# EAGLE board Proiect TSC (EAGLE 9.7.0)
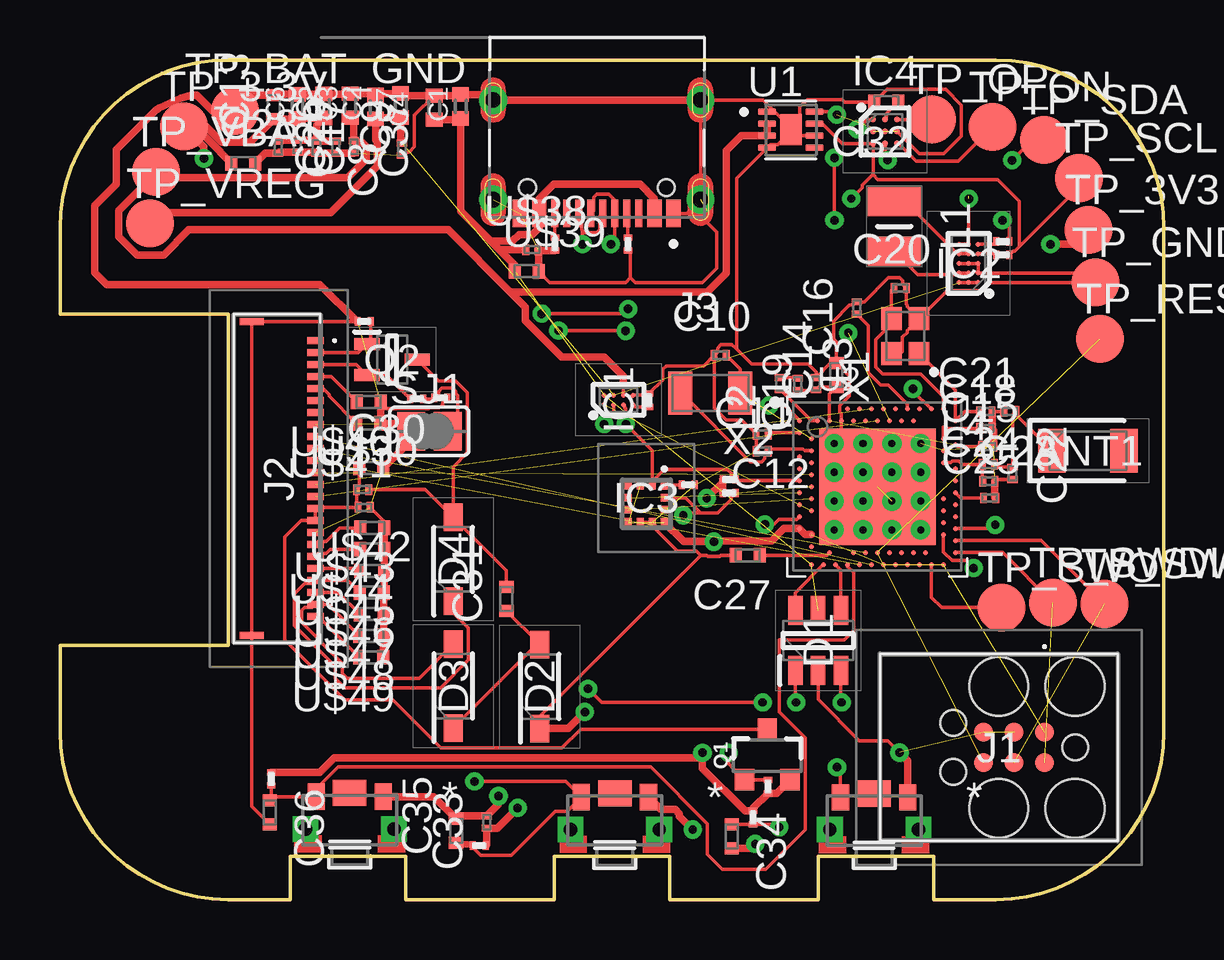
[diagram p0: board, top side]
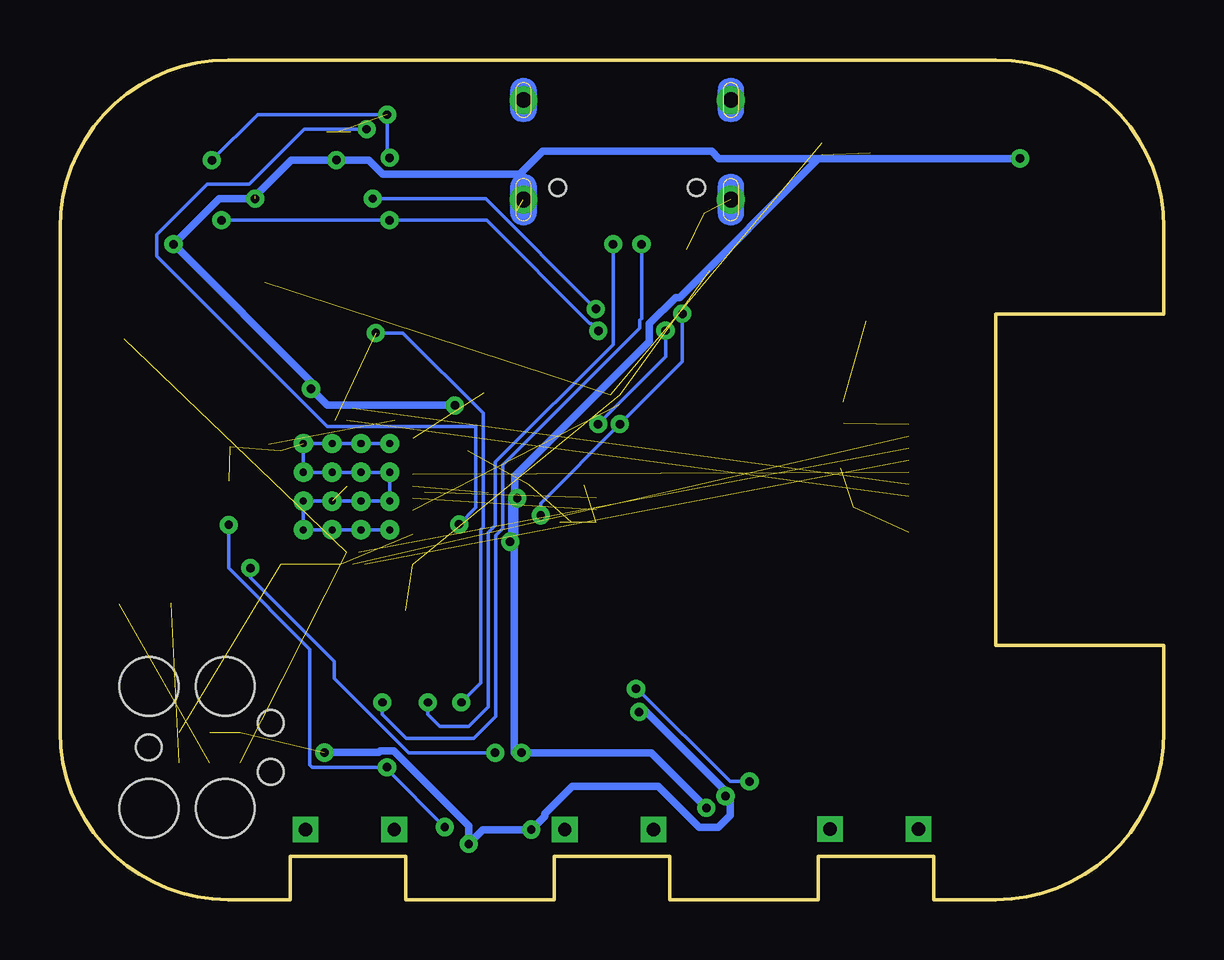
[diagram p1: board, bottom side, seen from below]

Size 46 x 35 mm. Coordinates in mm from the lower left corner, seen from the top.
Outline: 39,0 36.4,0 36.4,1.8 31.6,1.8 31.6,0 25.4,0 25.4,1.8 20.6,1.8 20.6,0 14.4,0 14.4,1.8 9.6,1.8 9.6,0 7,0 arc-90 0,7 0,10.6 7,10.6 7,24.4 0,24.4 0,28 arc-90 7,35 39,35 arc-90 46,28 46,7 arc-90 39,0
Copper layers (1*16): Top 0.035mm / dielectric 1.5mm / Bottom 0.035mm
Design rules "Fusion Electronics Design Rules": minimum track width 6mil, minimum drill 0.35mm, track to track 6mil, track to pad 6mil, pad to pad 6mil, via to via 6mil, smd to smd 6mil, copper to edge 40mil, drill to drill 6mil, minimum pad ring 10mil, minimum via ring 8mil, stop-mask expansion 4mil, vias tented up to drill 9999mil, thermal gap 10mil

## Footprints (pad centres in the part's own frame; a part is rotated, then mirrored left to right if it is on the bottom)
2450AT18B100E_ANTC3216X140N = smd 1.15 x 1.8: 1 -1.5,0; 2 1.5,0
PERFECT_0402_0402 = smd 0.6 x 0.7: 1 -0.5,0; 2 0.5,0
NORDIC_NRF_3_RESC0201_L = smd 0.28 x 0.43: 1 -0.255,0; 2 0.255,0
NORDIC_NRF_3_RESC0402_L = smd 0.5 x 0.6: 1 -0.5,0; 2 0.5,0
ESP32_C6_LIBRARY_3_SOT95P280X145-6N = smd 1.2 x 0.6: 1 -1.25,0.95; 2 -1.25,0; 3 -1.25,-0.95; 4 1.25,-0.95; 5 1.25,0; 6 1.25,0.95
ESP32_C6_LIBRARY_5_SOD3716X135N = smd 1.15 x 0.8: 1 -1.75,0; 2 1.75,0
BQ25180YBGR_BGA8C40P2X4_100X155X50 = smd 0.2 x 0.2: A1 -0.2,0.6; A2 0.2,0.6; B1 -0.2,0.2; B2 0.2,0.2; C1 -0.2,-0.2; C2 0.2,-0.2; D1 -0.2,-0.6; D2 0.2,-0.6
RT6160AWSC_BGA15C40P3X5_140X230X60 = smd 0.216 x 0.216: A1 -0.4,0.8; A2 0,0.8; A3 0.4,0.8; B1 -0.4,0.4; B2 0,0.4; B3 0.4,0.4; C1 -0.4,0; C2 0,0; C3 0.4,0; D1 -0.4,-0.4; D2 0,-0.4; D3 0.4,-0.4; E1 -0.4,-0.8; E2 0,-0.8; E3 0.4,-0.8
BMA423_BMA423 = smd 0.3 x 0.35: 1 -0.75,-0.775; 2 -0.25,-0.775; 3 0.25,-0.775; 4 0.75,-0.775; 7 0.75,0.775; 8 0.25,0.775; 9 -0.25,0.775; 10 -0.75,0.775 | smd 0.35 x 0.3: 5 0.775,-0.25; 6 0.775,0.25; 11 -0.775,0.25; 12 -0.775,-0.25
DRV2605YZFR_BGA9C50P3X3_144X144X62 = smd 0.25 x 0.25: A1 -0.5,0.5; A2 0,0.5; A3 0.5,0.5; B1 -0.5,0; B2 0,0; B3 0.5,0; C1 -0.5,-0.5; C2 0,-0.5; C3 0.5,-0.5
TC2030-IDC_TC2030IDC = smd 0.783 x 0.783: 1 -0.953,-0.635; 2 -0.953,0.635; 3 0.317,-0.635; 4 0.317,0.635; 5 1.588,-0.635; 6 1.588,0.635 | hole 2.451: -2.223,-2.54; -2.223,2.54; 0.952,-2.54; 0.952,2.54 | hole 1.067: -2.223,0; 2.857,-1.016; 2.857,1.016
503480-2400_5034802400 = smd 0.3 x 0.7: 1 -5.75,1.525; 2 -5.25,1.525; 3 -4.75,1.525; 4 -4.25,1.525; 5 -3.75,1.525; 6 -3.25,1.525; 7 -2.75,1.525; 8 -2.25,1.525; 9 -1.75,1.525; 10 -1.25,1.525; 11 -0.75,1.525; 12 -0.25,1.525; 13 0.25,1.525; 14 0.75,1.525; 15 1.25,1.525; 16 1.75,1.525; 17 2.25,1.525; 18 2.75,1.525; 19 3.25,1.525; 20 3.75,1.525; 21 4.25,1.525; 22 4.75,1.525; 23 5.25,1.525; 24 5.75,1.525 | smd 0.3 x 1: MP1 -6.54,-1.125; MP2 6.54,-1.125
KH-TYPE-C-16P_KINGHELM_KH-TYPE-C-16P = smd 0.6 x 1.15: A1_B12 -3.2,4.725; A4_B9 -2.4,4.725; A9_B4 2.4,4.725; A12_B1 3.2,4.725 | smd 0.3 x 1.15: A5 -1.25,4.725; A6 -0.25,4.725; A7 0.25,4.725; A8 1.25,4.725; B5 1.75,4.725; B6 0.75,4.725; B7 -0.75,4.725; B8 -1.75,4.725 | drill 0.65 pad 1.05: SH1 -4.32,0; SH2 4.32,0; SH3 -4.32,4.15; SH4 4.32,4.15 | hole 0.7: -2.89,3.65; 2.89,3.65
MLP2016SR47MT0S1_INDC2016X100N = smd 1.2 x 2.2: 1 -1.028,0; 2 1.028,0
NORDIC_NRF_2_RESC0201_L = smd 0.28 x 0.43: 1 -0.255,0; 2 0.255,0
ESP32_C6_LIBRARY_4_ESP32_C6_LIBRARY_4_ESP32_C6_LIBRARY_4_ESP32_C6_LIBRARY_4_ESP32_WROVER_SPARKFUN-DISCRETESEMI_SOT23-3 = smd 0.8 x 0.9: 1 -0.95,-1; 2 0.95,-1; 3 0,1.1
ESP32_C6_LIBRARY_6_SOT65P210X110-3N = smd 1.05 x 0.5: 1 -1.05,0.65; 2 -1.05,-0.65; 3 1.05,0
CPF0201D7K68C1_0201 = smd 0.35 x 0.25: 1 0,0.275; 2 0,-0.275
ESP32_C6_LIBRARY_7_JUMPER_SJ = smd 1.168 x 1.6: 1 -0.762,0; 2 0.762,0
2025-10-22_07-23-44_LIBRARY_SW_EVP-AKE31A_PAN = smd 0.711 x 1.092: 1 -1.4,-0.972; 2 1.4,-0.972 | drill 0.559 pad 0.914 square: 3 -1.848,0.381; 4 1.848,0.381 | smd 1.397 x 1.092: 5 0,-1.124
HECTOR_WATCH_1_TP20R = smd 2 x 2: TP 0,0
ESP32_C6_LIBRARY_SON50P200X200X80-9N = smd 0.76 x 0.27: 1 -0.985,0.75; 2 -0.985,0.25; 3 -0.985,-0.25; 4 -0.985,-0.75; 5 0.985,-0.75; 6 0.985,-0.25; 7 0.985,0.25; 8 0.985,0.75 | smd 0.9 x 1.3: 9 0,0
NORDIC_NRF_4_AQFN50P700X700X85_HS-74N = smd 4.85 x 4.85: P$74 0,0 | drill 0.3 pad 0.6: P$75 -1.8,1.8; P$76 -0.6,1.8; P$77 0.6,1.8; P$78 1.8,1.8; P$79 -1.8,0.6; P$80 -0.6,0.6; P$81 0.6,0.6; P$82 1.8,0.6; P$83 -1.8,-0.6; P$84 -0.6,-0.6; P$85 0.6,-0.6; P$86 1.8,-0.6; P$87 -1.8,-1.8; P$88 -0.6,-1.8; P$89 0.6,-1.8; P$90 1.8,-1.8 | smd 0.2 x 0.2: P$A8 -1.25,3.25; P$A10 -0.75,3.25; P$A12 -0.25,3.25; P$A14 0.25,3.25; P$A16 0.75,3.25; P$A18 1.25,3.25; P$A20 1.75,3.25; P$A22 2.25,3.25; P$A23 2.75,3.25; P$AA24 3.25,-2.25; P$AB2 -2.75,-2.5; P$AC5 -2,-2.75; P$AC9 -1,-2.75; P$AC11 -0.5,-2.75; P$AC13 0,-2.75; P$AC15 0.5,-2.75; P$AC17 1,-2.75; P$AC19 1.5,-2.75; P$AC21 2,-2.75; P$AC24 3.25,-2.75; P$AD2 -2.75,-3.25; P$AD4 -2.25,-3.25; P$AD6 -1.75,-3.25; P$AD8 -1.25,-3.25; P$AD10 -0.75,-3.25; P$AD12 -0.25,-3.25; P$AD14 0.25,-3.25; P$AD16 0.75,-3.25; P$AD18 1.25,-3.25; P$AD20 1.75,-3.25; P$AD22 2.25,-3.25; P$AD23 2.75,-3.25; P$B1 -3.25,2.75; P$B3 -2.5,2.75; P$B5 -2,2.75; P$B7 -1.5,2.75; P$B9 -1,2.75; P$B11 -0.5,2.75; P$B13 0,2.75; P$B15 0.5,2.75; P$B17 1,2.75; P$B19 1.5,2.75; P$B24 3.25,2.75; P$C1 -3.25,2.25; P$D2 -2.75,2; P$D23 2.75,2; P$E24 3.25,1.75; P$F2 -2.75,1.5; P$F23 2.75,1.5; P$G1 -3.25,1.25; P$H2 -2.75,1; P$H23 2.75,1; P$J1 -3.25,0.75; P$J24 3.25,0.75; P$K2 -2.75,0.5; P$L1 -3.25,0.25; P$L24 3.25,0.25; P$M2 -2.75,0; P$N1 -3.25,-0.25; P$N24 3.25,-0.25; P$P2 -2.75,-0.5; P$P23 2.75,-0.5; P$R1 -3.25,-0.75; P$R24 3.25,-0.75; P$T2 -2.75,-1; P$T23 2.75,-1; P$U1 -3.25,-1.25; P$U24 3.25,-1.25; P$V23 2.75,-1.5; P$W1 -3.25,-1.75; P$W24 3.25,-1.75; P$Y2 -2.75,-2; P$Y23 2.75,-2
NORDIC_NRF_BT-XTAL_2016_N = smd 0.95 x 0.85: 1 -0.725,-0.575; 2 0.725,-0.575; 3 0.725,0.575; 4 -0.725,0.575
NORDIC_NRF_1_XTAL_3215_N = smd 1 x 1.8: 1 -1.25,0; 2 1.25,0

## Placement (x,y rotation side)
ANT1  2450AT18B100E_2450AT18B100E  [2450AT18B100E_ANTC3216X140N]  42.83,18.71 0 top
C1  1uF  [PERFECT_0402_0402]  16.69,33.06 90 top
C2  10uF  [PERFECT_0402_0402]  14.19,33.1 90 top
C3  1uF  [PERFECT_0402_0402]  12.09,33.09 90 top
C4  10uF  [PERFECT_0402_0402]  13.15,33.05 270 top
C5  22uF  [PERFECT_0402_0402]  10.99,33.08 90 top
C6  22uF  [PERFECT_0402_0402]  9.89,33.07 90 top
C7  4.7uF  [PERFECT_0402_0402]  15.59,33.01 90 top
C8  0.1uF  [NORDIC_NRF_3_RESC0201_L]  14.25,31.28 90 top
C9  100Nf  [NORDIC_NRF_3_RESC0201_L]  11.49,31.36 270 top
C10  12pF  [NORDIC_NRF_3_RESC0201_L]  27.51,22.69 0 top
C11  12pF  [NORDIC_NRF_3_RESC0201_L]  29.26,18.69 0 top
C12  100nF  [NORDIC_NRF_3_RESC0201_L]  29.26,19.4 180 top
C13  4.7uF  [NORDIC_NRF_3_RESC0402_L]  8.9,33.04 90 top
C14  1.0uF  [NORDIC_NRF_3_RESC0402_L]  32.35,21.86 90 top
C15  47nF  [NORDIC_NRF_3_RESC0201_L]  38.66,18.89 0 top
C16  N.C.  [NORDIC_NRF_3_RESC0201_L]  33.2,24.66 90 top
C17  100nF  [NORDIC_NRF_3_RESC0201_L]  10.69,31.36 270 top
C18  100pF  [NORDIC_NRF_3_RESC0201_L]  38.58,19.64 0 top
C19  N.C.  [NORDIC_NRF_3_RESC0201_L]  31.5,21.51 90 top
C20  12pF  [NORDIC_NRF_3_RESC0201_L]  35.01,25.49 0 top
C21  12pF  [NORDIC_NRF_3_RESC0201_L]  38.58,20.34 0 top
C22  1pF  [NORDIC_NRF_3_RESC0201_L]  39.69,17.77 270 top
C23  N.C  [NORDIC_NRF_3_RESC0201_L]  39.58,20.35 180 top
C24  1pF  [NORDIC_NRF_3_RESC0201_L]  38.7,17.44 0 top
C25  820pF  [NORDIC_NRF_3_RESC0201_L]  38.73,16.74 0 top
C26  100nF  [NORDIC_NRF_3_RESC0201_L]  9.89,31.41 270 top
C27  4.7uF  [NORDIC_NRF_3_RESC0402_L]  28.65,14.35 180 top
C28  4.7uF  [NORDIC_NRF_3_RESC0402_L]  7.64,30.69 0 top
C29  100nF  [NORDIC_NRF_3_RESC0201_L]  9.09,31.36 270 top
C30  10uF  [NORDIC_NRF_3_RESC0402_L]  12.96,17.99 0 top
C31  4.7uF/25V  [NORDIC_NRF_3_RESC0402_L]  18.6,12.54 90 top
C32  1uF  [NORDIC_NRF_3_RESC0402_L]  34.43,33.25 180 top
C33  0.1uF  [NORDIC_NRF_3_RESC0201_L]  17.78,3.23 90 top
C34  1uF  [NORDIC_NRF_3_RESC0402_L]  27.99,2.64 270 top
C35  1uF  [NORDIC_NRF_3_RESC0402_L]  16.5,2.86 90 top
C36  1uF  [NORDIC_NRF_3_RESC0402_L]  8.74,3.63 270 top
C37  0.1uF  [NORDIC_NRF_3_RESC0201_L]  12.24,31.38 270 top
D1  USBLC6-2SC6Y  [ESP32_C6_LIBRARY_3_SOT95P280X145-6N]  31.59,10.8 90 top
D2  MBR0530  [ESP32_C6_LIBRARY_5_SOD3716X135N]  19.99,8.88 90 top
D3  MBR0530  [ESP32_C6_LIBRARY_5_SOD3716X135N]  16.39,8.9 90 top
D4  MBR0530  [ESP32_C6_LIBRARY_5_SOD3716X135N]  16.38,14.18 90 top
IC1  BQ25180YBGR  [BQ25180YBGR_BGA8C40P2X4_100X155X50]  23.27,20.83 90 top
IC2  RT6160AWSC  [RT6160AWSC_BGA15C40P3X5_140X230X60]  37.86,26.52 180 top
IC3  BMA423  [BMA423_BMA423]  24.43,16.5 180 top
IC4  DRV2605YZFR  [DRV2605YZFR_BGA9C50P3X3_144X144X62]  34.38,32.02 0 top
J1  TC2030-IDC  [TC2030-IDC_TC2030IDC]  40.07,6.34 180 top
J2  503480-2400  [503480-2400_5034802400]  9.12,17.55 270 top
J3  KH-TYPE-C-16P  [KH-TYPE-C-16P_KINGHELM_KH-TYPE-C-16P]  22.37,33.33 180 top
L1  FTC252012SR47MBCA  [MLP2016SR47MT0S1_INDC2016X100N]  34.76,28.06 90 top
L2  10uF  [NORDIC_NRF_2_RESC0201_L]  30,21.51 90 top
L3  15nH  [NORDIC_NRF_2_RESC0201_L]  30.74,21.48 270 top
L4  3.9nH  [NORDIC_NRF_2_RESC0201_L]  38.68,18.14 0 top
Q1  20V/4.2A/52mΩ/1.4W  [ESP32_C6_LIBRARY_4_ESP32_C6_LIBRARY_4_ESP32_C6_LIBRARY_4_ESP32_C6_LIBRARY_4_ESP32_WROVER_SPARKFUN-DISCRETESEMI_SOT23-3]  29.47,6 0 top
Q2  SI1308EDL  [ESP32_C6_LIBRARY_6_SOT65P210X110-3N]  13.84,22.51 0 top
R1  10K  [CPF0201D7K68C1_0201]  24.54,20.81 0 top
R2  3K3  [CPF0201D7K68C1_0201]  27.88,16.95 90 top
R3  3K3  [CPF0201D7K68C1_0201]  27.88,17.51 90 top
R4  0  [CPF0201D7K68C1_0201]  39.28,26.87 90 top
R5  0  [CPF0201D7K68C1_0201]  39.28,27.43 90 top
R6  0  [CPF0201D7K68C1_0201]  26.18,17.29 90 top
R7  10K  [CPF0201D7K68C1_0201]  29.5,4.71 0 top
R8  10K  [CPF0201D7K68C1_0201]  12.68,24.11 90 top
R9  0.47  [CPF0201D7K68C1_0201]  14.86,20.87 270 top
R10  2.2  [CPF0201D7K68C1_0201]  15.86,20.91 270 top
R11  10K  [CPF0201D7K68C1_0201]  8.8,5.03 180 top
R12  10K  [CPF0201D7K68C1_0201]  17.47,2.25 90 top
R13  10K  [CPF0201D7K68C1_0201]  28.88,3.42 180 top
R14  5K1  [CPF0201D7K68C1_0201]  20.62,27.32 0 top
R15  5K1  [CPF0201D7K68C1_0201]  23.66,27.32 180 top
SJ1  SJ1  [ESP32_C6_LIBRARY_7_JUMPER_SJ]  15.39,19.52 0 top
SW1  SW1  [2025-10-22_07-23-44_LIBRARY_SW_EVP-AKE31A_PAN]  12.07,3.32 180 top
SW2  2025-10-22_07-23-44_LIBRARY_EVP-AKE31ASW_EVP-AKE31A_PAN  [2025-10-22_07-23-44_LIBRARY_SW_EVP-AKE31A_PAN]  23.12,3.3 180 top
SW3  2025-10-22_07-23-44_LIBRARY_EVP-AKE31ASW_EVP-AKE31A_PAN  [2025-10-22_07-23-44_LIBRARY_SW_EVP-AKE31A_PAN]  33.92,3.29 180 top
TP_3.3V  HECTOR_WATCH_1_TPTP20R  [HECTOR_WATCH_1_TP20R]  5.16,32.22 0 top
TP_3V3  HECTOR_WATCH_1_TPTP20R  [HECTOR_WATCH_1_TP20R]  42.86,27.92 0 top
TP_BAT_GND  HECTOR_WATCH_1_TPTP20R  [HECTOR_WATCH_1_TP20R]  7.29,32.87 0 top
TP_GND  HECTOR_WATCH_1_TPTP20R  [HECTOR_WATCH_1_TP20R]  43.15,25.72 0 top
TP_ON  HECTOR_WATCH_1_TPTP20R  [HECTOR_WATCH_1_TP20R]  38.86,32.21 0 top
TP_OP  HECTOR_WATCH_1_TPTP20R  [HECTOR_WATCH_1_TP20R]  36.33,32.52 0 top
TP_RESET  HECTOR_WATCH_1_TPTP20R  [HECTOR_WATCH_1_TP20R]  43.33,23.37 0 top
TP_SCL  HECTOR_WATCH_1_TPTP20R  [HECTOR_WATCH_1_TP20R]  42.45,30.07 0 top
TP_SDA  HECTOR_WATCH_1_TPTP20R  [HECTOR_WATCH_1_TP20R]  41.01,31.67 0 top
TP_SWDCLK  HECTOR_WATCH_1_TPTP20R  [HECTOR_WATCH_1_TP20R]  43.52,12.32 0 top
TP_SWDIO  HECTOR_WATCH_1_TPTP20R  [HECTOR_WATCH_1_TP20R]  41.37,12.37 0 top
TP_SWO  HECTOR_WATCH_1_TPTP20R  [HECTOR_WATCH_1_TP20R]  39.22,12.17 0 top
TP_VBAT  HECTOR_WATCH_1_TPTP20R  [HECTOR_WATCH_1_TP20R]  4,30.33 0 top
TP_VREG  HECTOR_WATCH_1_TPTP20R  [HECTOR_WATCH_1_TP20R]  3.75,28.18 0 top
U1  MAX17048G+T10  [ESP32_C6_LIBRARY_SON50P200X200X80-9N]  30.45,32.09 0 top
U2  NRF52840_QF  [NORDIC_NRF_4_AQFN50P700X700X85_HS-74N]  34.06,17.21 0 top
U$30  68uH  [NORDIC_NRF_2_RESC0201_L]  12.61,17.09 0 top
U$38  0.1uF  [NORDIC_NRF_3_RESC0201_L]  19.66,27.09 0 top
U$39  4.7uF  [NORDIC_NRF_3_RESC0402_L]  19.44,26.19 0 top
U$40  1uF/50V  [NORDIC_NRF_3_RESC0402_L]  12.86,20.75 180 top
U$41  1uF/50V  [NORDIC_NRF_3_RESC0402_L]  12.85,19.85 180 top
U$42  0.1uF/50  [NORDIC_NRF_3_RESC0201_L]  12.67,16.35 180 top
U$43  1uF/50V  [NORDIC_NRF_3_RESC0402_L]  13.02,15.5 180 top
U$44  1uF/50V  [NORDIC_NRF_3_RESC0402_L]  13.01,14.6 180 top
U$45  1uF/50V  [NORDIC_NRF_3_RESC0402_L]  13,13.7 180 top
U$46  1uF/50V  [NORDIC_NRF_3_RESC0402_L]  12.99,12.8 180 top
U$47  1uF/50V  [NORDIC_NRF_3_RESC0402_L]  12.98,11.9 180 top
U$48  1uF/50V  [NORDIC_NRF_3_RESC0402_L]  12.97,11 180 top
U$49  1uF/50V  [NORDIC_NRF_3_RESC0402_L]  12.96,10.1 180 top
X1  32MHz  [NORDIC_NRF_BT-XTAL_2016_N]  35.22,23.49 90 top
X2  32.768kHz  [NORDIC_NRF_1_XTAL_3215_N]  27.1,21.12 180 top

## Library data of the parts
ANT1 = InkTime_v5; ARROW_PART_NUMBER: 2450AT18B100E; ARROW_PRICE-STOCK: https://www.arrow.com/en/products/2450at18b100e/johanson-dielectrics?utm_currency=USD&region=nac; DESCRIPTION: Antennas 2.45GHz ANTENNA; HEIGHT: 1.4mm; MANUFACTURER_NAME: JOHANSON TECHNOLOGY; MANUFACTURER_PART_NUMBER: 2450AT18B100E; MOUSER_PART_NUMBER: 609-2450AT18B100E; MOUSER_PRICE-STOCK: https://www.mouser.co.uk/ProductDetail/Johanson-Technology/2450AT18B100E?qs=yCnrNFeXz%252Bh5MFsFIXGZGA%3D%3D
C1-C37 L2-L4 R1-R15 SJ1 TP_3.3V TP_3V3 TP_BAT_GND TP_GND TP_ON TP_OP TP_RESET TP_SCL TP_SDA TP_SWDCLK TP_SWDIO TP_SWO TP_VBAT TP_VREG U2 U$30 U$38-U$49 X1 X2 = InkTime_v5
D1 = InkTime_v5; AVAILABILITY: In Stock; CHECK_PRICES: https://www.snapeda.com/parts/USBLC6-2SC6Y/STMicroelectronics/view-part/?ref=eda; DESCRIPTION: 17V Clamp 5A (8/20µs) Ipp Tvs Diode Surface Mount SOT-23-6; MF: STMicroelectronics; MP: USBLC6-2SC6Y; PACKAGE: SOT-23-6 STMicroelectronics; PRICE: None; SNAPEDA_LINK: https://www.snapeda.com/parts/USBLC6-2SC6Y/STMicroelectronics/view-part/?ref=snap
D2-D4 = InkTime_v5; AVAILABILITY: In Stock; CHECK_PRICES: https://www.snapeda.com/parts/MBR0530/Onsemi/view-part/?ref=eda; DESCRIPTION: Diode Schottky 30 V 500mA Surface Mount SOD-123; MF: ON Semiconductor; MP: MBR0530; PACKAGE: SOD-123-2 ON Semiconductor; PRICE: None; PURCHASE-URL: https://www.snapeda.com/api/url_track_click_mouser/?unipart_id=179458&manufacturer=ON Semiconductor&part_name=MBR0530&search_term=None; SNAPEDA_LINK: https://www.snapeda.com/parts/MBR0530/Onsemi/view-part/?ref=snap
IC1 = InkTime_v5; ARROW_PART_NUMBER: BQ25180YBGR; ARROW_PRICE-STOCK: https://www.arrow.com/en/products/bq25180ybgr/texas-instruments?utm_currency=USD&region=nac; DESCRIPTION: Charger IC Lithium Ion/Polymer, Lithium Iron Phosphate 8-DSBGA (1.6x1.1); HEIGHT: 0.5mm; MANUFACTURER_NAME: Texas Instruments; MANUFACTURER_PART_NUMBER: BQ25180YBGR; MOUSER_PART_NUMBER: 595-BQ25180YBGR; MOUSER_PRICE-STOCK: https://www.mouser.co.uk/ProductDetail/Texas-Instruments/BQ25180YBGR?qs=doiCPypUmgEWjAK%252BJAX6Tw%3D%3D
IC2 = InkTime_v5; DESCRIPTION: Buck-Boost Regulator Positive Output Step-Up/Step-Down I2C DC-DC Controller IC 15-WL-CSP (BSC) (1.4x2.3); HEIGHT: 0.6mm; MANUFACTURER_NAME: RICHTEK; MANUFACTURER_PART_NUMBER: RT6160AWSC; MOUSER_PART_NUMBER: 835-RT6160AWSC; MOUSER_PRICE-STOCK: https://www.mouser.co.uk/ProductDetail/Richtek/RT6160AWSC?qs=amGC7iS6iy%2FLd9PSoixZXQ%3D%3D
IC3 = InkTime_v5; ARROW_PART_NUMBER: BMA423; ARROW_PRICE-STOCK: https://www.arrow.com/en/products/bma423/bosch; DESCRIPTION: Accelerometers Triaxial low-g 12bit Acceleration Sensor; HEIGHT: 1mm; MANUFACTURER_NAME: BOSCH; MANUFACTURER_PART_NUMBER: BMA423; MOUSER_PART_NUMBER: 262-BMA423; MOUSER_PRICE-STOCK: https://www.mouser.co.uk/ProductDetail/Bosch-Sensortec/BMA423?qs=HXFqYaX1Q2xC%252BSgeGoX3mg%3D%3D
IC4 = InkTime_v5; ARROW_PART_NUMBER: DRV2605YZFR; ARROW_PRICE-STOCK: https://www.arrow.com/en/products/drv2605yzfr/texas-instruments?region=nac; DESCRIPTION: Haptic Driver for ERM/LRA with Built-In Library and Smart Loop Architecture; HEIGHT: 0.625mm; MANUFACTURER_NAME: Texas Instruments; MANUFACTURER_PART_NUMBER: DRV2605YZFR
J1 = InkTime_v5; DESCRIPTION: CABLE ADAPTER 6 POS; HEIGHT: 19mm; MANUFACTURER_NAME: Tag Connect; MANUFACTURER_PART_NUMBER: TC2030-IDC
J2 = InkTime_v5; DESCRIPTION: FFC & FPC Connectors 0.5mm FPC RA SMT Dual Contact 24Ckt; HEIGHT: 1.87mm; MANUFACTURER_NAME: Molex; MANUFACTURER_PART_NUMBER: 503480-2400; MOUSER_PART_NUMBER: 538-503480-2400; MOUSER_PRICE-STOCK: https://www.mouser.co.uk/ProductDetail/Molex/503480-2400?qs=OAhjpuo3Vu7efIoxFh9AOw%3D%3D
J3 = InkTime_v5; AVAILABILITY: Not in stock; CHECK_PRICES: https://www.snapeda.com/parts/KH-TYPE-C-16P/Kinghelm/view-part/?ref=eda; MF: kinghelm; MP: KH-TYPE-C-16P; PACKAGE: None; PRICE: None; SNAPEDA_LINK: https://www.snapeda.com/parts/KH-TYPE-C-16P/Kinghelm/view-part/?ref=snap
L1 = InkTime_v5; DESCRIPTION: SMD / SMT Inductors (Coils), L=0.47?H, L x W x T :; HEIGHT: 1mm; JLCPCB: https://jlcpcb.com/partdetail/6763488-FTC252012SR47MBCA/C5832368; MANUFACTURER_NAME: TDK; MANUFACTURER_PART_NUMBER: FTC252012SR47MBCA
Q1 = InkTime_v5; PROD_ID: TRAN-14388
Q2 = InkTime_v5; AVAILABILITY: In Stock; CHECK_PRICES: https://www.snapeda.com/parts/SI1308EDL-T1-GE3/Vishay+Siliconix/view-part/?ref=eda; DESCRIPTION: Si1308EDL-T1-GE3 N-channel MOSFET Transistor, 1.5 A, 30 V, 3-Pin SC-70 | Siliconix / Vishay SI1308EDL-T1-GE3; MF: Vishay Siliconix; MP: SI1308EDL-T1-GE3; PACKAGE: SOT-323 Vishay Semiconductor; PRICE: None; PURCHASE-URL: https://www.snapeda.com/api/url_track_click_mouser/?unipart_id=274603&manufacturer=Vishay Siliconix&part_name=SI1308EDL-T1-GE3&search_term=None; SNAPEDA_LINK: https://www.snapeda.com/parts/SI1308EDL-T1-GE3/Vishay+Siliconix/view-part/?ref=snap
SW1-SW3 = InkTime_v5; COPYRIGHT: Copyright (C) 2025 Ultra Librarian. All rights reserved.; DIGI-KEY_PART_NUMBER_1: P123437TR-ND; DIGI-KEY_PART_NUMBER_2: P123437CT-ND; DIGI-KEY_PART_NUMBER_3: P123437DKR-ND; MANUFACTURER_NAME: Panasonic; MANUFACTURER_PART_NUMBER: EVP-AKE31A
U1 = InkTime_v5; AVAILABILITY: In Stock; CHECK_PRICES: https://www.snapeda.com/parts/MAX17048G+T10/Analog+Devices/view-part/?ref=eda; DESCRIPTION: 3µA 1-Cell/2-Cell Fuel Gauge with ModelGauge; MF: Analog Devices; MP: MAX17048G+T10; PACKAGE: TDFN-8 Maxim; PRICE: None; PURCHASE-URL: https://www.snapeda.com/api/url_track_click_mouser/?unipart_id=329239&manufacturer=Analog Devices&part_name=MAX17048G+T10&search_term=None; SNAPEDA_LINK: https://www.snapeda.com/parts/MAX17048G+T10/Analog+Devices/view-part/?ref=snap

## Nets
3V3: C5.1 C6.1 C9.1 C13.1 C17.1 C26.1 C28.1 C29.1 C33.1 IC2.E2 IC2.E3 IC3.3 IC3.7 IC3.10 IC4.C2 J1.1 Q1.2 R2.1 R3.1 R7.2 R11.2 R12.2 R13.2 TP_3.3V.TP TP_3V3.TP U2.P$A22 U2.P$AD14 U2.P$AD23 U2.P$B1 U2.P$W1 U2.P$Y2
ALERT: U1.5
ALERT/2.5C: U2.P$J24
D+: D1.4 U2.P$AD6
D-: D1.6 U2.P$AD4
DN: D1.1 J3.A7 J3.B7
DP: D1.3 J3.A6 J3.B6
EPD_3V3: C30.1 J2.15 J2.16 Q1.3 U$30.1 U$42.2
EPD_BUSY: J2.9 U2.P$AD12
EPD_CS: J2.12 U2.P$K2
EPD_DC: J2.11 U2.P$AD10
EPD_RST: J2.10 U2.P$AC11
GDR: J2.2 Q2.1 R8.2
GND: C1.2 C2.2 C3.2 C4.1 C5.2 C6.2 C7.2 C8.1 C9.2 C10.1 C11.1 C12.2 C13.2 C14.2 C15.2 C16.2 C17.2 C18.2 C19.2 C20.2 C21.2 C22.2 C23.2 C24.2 C25.2 C26.2 C27.2 C28.2 C29.2 C30.2 C32.2 C33.2 C34.2 C35.2 C36.2 C37.2 D1.2 D2.1 IC1.D2 IC2.B1 IC2.C1 IC2.C2 IC2.C3 IC3.8 IC3.9 IC4.B1 IC4.B3 J1.3 J1.5 J2.8 J2.17 J2.MP1 J2.MP2 J3.A1_B12 J3.A12_B1 J3.SH1 J3.SH2 J3.SH3 J3.SH4 R1.1 R6.2 R8.1 R10.1 R14.2 R15.1 SJ1.1 SW1.1 SW2.1 SW3.1 TP_BAT_GND.TP TP_GND.TP U1.1 U1.4 U1.6 U1.9 U2.P$74 U2.P$75 U2.P$76 U2.P$77 U2.P$78 U2.P$79 U2.P$80 U2.P$81 U2.P$82 U2.P$83 U2.P$84 U2.P$85 U2.P$86 U2.P$87 U2.P$88 U2.P$89 U2.P$90 U2.P$B7 U2.P$F23 U$38.2 U$39.2 U$40.1 U$41.1 U$42.1 U$43.1 U$44.1 U$45.1 U$46.1 U$47.1 U$48.1 U$49.1 X1.2 X1.4
HAPTIC_EN: IC4.A1 U2.P$U1
IMU_INT1: IC3.5 U2.P$N1
IMU_INT2: IC3.6 U2.P$P2
LX1: IC2.B2 IC2.B3 L1.1
LX2: IC2.D2 IC2.D3 L1.2
MOSI: J2.14 U2.P$B13
N$1: ANT1.1 C22.1 C23.1 L4.2
N$2: IC1.D1 R1.2
N$3: C20.1 U2.P$A23 X1.3
N$4: IC2.D1 R4.1
N$5: C12.1 U2.P$C1
N$6: IC2.E1 R5.1
N$7: C10.2 U2.P$D2 X2.1
N$8: C11.2 U2.P$F2 X2.2
N$9: C31.1 D2.2 D3.1
N$10: IC3.1 R6.1
N$11: L2.2 L3.1
N$12: C14.1 C15.1 C19.1 L3.2 U2.P$B5 U2.P$E24
N$13: C31.2 D4.2 Q2.3 U$30.2
N$14: C21.1 U2.P$B24 X1.1
N$15: L2.1 U2.P$B3
N$16: C18.1 U2.P$D23
N$19: C24.1 L4.1 U2.P$H23
N$21: C32.1 IC4.A2
N$23: C27.1 U2.P$AC5
N$24: C25.1 U2.P$N24
N$25: J2.4 U$40.2
N$26: J2.5 U$41.2
N$27: C16.1 U2.P$A18
N$29: J3.A5 R15.2
N$35: R9.1 R10.2 SJ1.2
N$40: J2.18 U$43.2
N$41: J2.19 U$44.2
N$42: J2.20 U$45.2
N$44: J2.22 U$47.2
N$46: J2.24 U$49.2
N$52: J3.B5 R14.1
OUT+: IC4.A3 TP_OP.TP
OUT-: IC4.C3 TP_ON.TP
P0.04: U2.P$J1
P0.09: U2.P$L24
P0.13: C36.1 R11.1 SW1.2 U2.P$AD8
P0.14: U2.P$AC9
P0.19: U2.P$AC15
P0.20: U2.P$AD16
P0.21: U2.P$AC17
P0.22: U2.P$AD18
P0.23: U2.P$AC19
P0.24: U2.P$AD20
P0.25: U2.P$AC21
P0.26: U2.P$G1
P0.27: U2.P$H2
P0.28: U2.P$B11
P0.29: U2.P$A10
P0.30: U2.P$B9
P0.31: U2.P$A8
P1.01: Q1.1 R7.1 U2.P$Y23
P1.02: C34.1 R13.1 SW3.2 U2.P$W24
P1.03: U2.P$V23
P1.04: U2.P$U24
P1.05: U2.P$T23
P1.06: U2.P$R24
P1.07: U2.P$P23
P1.09: U2.P$R1
P1.10: U2.P$A20
P1.11: U2.P$B19
P1.12: U2.P$B17
P1.13: U2.P$A16
P1.14: C35.1 R12.1 SW2.2 U2.P$B15
P1.15: U2.P$A14
PMIC_INT: IC1.A1 U2.P$T2
PREVGH: D4.1 J2.21 U$46.2
PREVGL: D3.2 J2.23 U$48.2
RESE: J2.3 Q2.2 R9.2
RESET: J1.6 TP_RESET.TP U2.P$AC13
SCK: J2.13 U2.P$A12
SCL: IC1.B1 IC3.12 IC4.C1 R2.2 R4.2 TP_SCL.TP U1.7 U2.P$M2
SDA: IC1.C1 IC3.2 IC4.B2 R3.2 R5.2 TP_SDA.TP U1.8 U2.P$L1
SWDCLK: J1.4 TP_SWDCLK.TP U2.P$AA24
SWDIO: J1.2 TP_SWDIO.TP U2.P$AC24
SWO: TP_SWO.TP U2.P$AD22
VBAT: C3.1 C37.1 IC1.C2 TP_VBAT.TP U1.2 U1.3
VBUS: C1.1 C7.1 D1.5 IC1.A2 J3.A4_B9 J3.A9_B4 U2.P$AD2 U$38.1 U$39.1
VREG: C2.1 C4.2 C8.2 IC1.B2 IC2.A1 IC2.A2 IC2.A3 TP_VREG.TP

## Tracks (layer width: path | path; a pad name or v marks a point on that pad's centre or on a via)
3V3  (via drill 0.35)  (6 unrouted)
  Top 0.152: 42.77,27.92 TP_3V3.TP | IC2.E3 IC2.E2 v37.87,29.21 | U2.P$A22 36.27,20.46 35.54,21.2 v35.54,21.29 | U2.P$B1 30.81,19.98 30.19,20.6 v29.55,20.6 | v34.49,30.83 34.38,30.93 IC4.C2
  Top 0.305: C29.1 9.14,31.66 C26.1 10.64,31.66 C17.1 | C17.1 10.69,32.28 C5.1 C6.1 9.86,32.54 C13.1 7.92,31.56 6.75,31.56 6.09,32.22 TP_3.3V.TP | R2.1 R3.1 27.6,17.39 v26.95,16.73 | C17.1 C9.1 | Q1.2 29.85,4.43 R7.2 28.88,3.81 R13.2 28.54,3.69 26.77,5.47 v26.77,6.12 26.56,5.91 11.43,5.91 10.82,5.3 R11.2 | R12.2 17.78,2.28 C33.1 18.22,2.97 v19.07,3.82 | C28.1 6.68,31.15 6.68,31.18 5.64,32.22 TP_3.3V.TP | v6,30.89 6,31.38 TP_3.3V.TP | U2.P$Y2 31.06,15.21 U2.P$W1 30.16,15.46 29.65,14.95 27.28,14.95 v27.25,14.92 25.99,14.92 IC3.10 | v41.27,27.32 42.17,27.32 42.77,27.92
  Bottom 0.305: v6,30.89 14.4,30.89 | v19.07,3.82 21.37,6.12 v26.77,6.12 27.07,6.12 27.07,15.23 27.06,15.24 27.06,16.84 | v34.49,30.82 36.37,30.82 37.87,29.32 | 35.47,21.22 35.47,21.52 v41.27,27.32 39.37,29.22 v37.88,29.22 v37.87,29.21 | 35.47,21.22 34.87,20.62 29.57,20.62 v29.55,20.6 | 14.4,30.89 18.55,30.89 18.85,31.2 25.89,31.2 26.84,30.24 32.55,30.24 33.13,30.82 v34.49,30.82 | 27.06,16.84 27.17,16.73 27.17,14.99 v27.25,14.92 | 27.06,16.84 27.06,17.66 21.45,23.27 21.45,24 20.35,25.1 20.19,25.1 14.4,30.89 | 27.06,16.84 v26.95,16.73 | v35.54,21.29 35.47,21.22 | v34.49,30.82 v34.49,30.83
D+
  Top 0.152: U2.P$AD6 32.54,13.73 D1.4
D-
  Top 0.152: U2.P$AD4 30.64,12.79 D1.6
DN  (via drill 0.35)
  Top 0.152: J3.A7 22.24,28.72 22.24,29.27 22.37,29.41 22.86,29.41 23.15,29.12 23.17,29.12 23.17,28.65 J3.B7 23.12,27.48 v22.95,27.32 | D1.1 30.64,8.25 v30.67,8.22
  Bottom 0.152: v22.95,27.32 22.95,23.14 27.86,18.23 27.86,15.59 28.16,15.29 28.16,8.03 28.97,7.22 30.17,7.22 30.67,7.72 v30.67,8.22
DP  (via drill 0.35)
  Top 0.152: 21.77,27.9 21.87,27.8 22.36,27.8 22.5,27.93 22.5,28.48 J3.A6 | J3.B6 21.74,28.48 21.74,27.93 21.77,27.9 | 21.77,27.9 v21.77,27.32 | D1.3 32.54,8.25 v32.57,8.22
  Bottom 0.152: v32.57,8.22 32.57,7.72 31.57,6.72 28.77,6.72 27.85,7.64 27.85,15.17 27.55,15.47 27.55,18.1 21.83,23.82 21.83,24.16 21.77,24.22 v21.77,27.32
EPD_3V3
  Top 0.152: 12.37,16.35 10.69,16.35 J2.15 J2.16 10.05,15.8 9.37,15.12 9.37,10.82 11.87,8.32 13.87,8.32 15.86,6.33 20.91,6.33 21.69,7.1 Q1.3 | 12.37,16.35 U$42.2 | 12.37,16.35 12.37,17.07 U$30.1 12.46,17.19 C30.1
EPD_BUSY  (1 unrouted)
EPD_CS  (1 unrouted)
EPD_DC  (1 unrouted)
EPD_RST  (1 unrouted)
GDR
  Top 0.152: J2.2 12.43,22.8 Q2.1 12.95,23.32 R8.2
GND  (via drill 0.35)  (17 unrouted)
  Top 0.152: R10.1 15.94,20.71 15.94,20.64 15.8,20.51 15.39,20.51 15.35,20.47 13.41,20.47 13.36,20.52 | C14.2 32.09,22.36 C19.2 31.5,21.99 31.17,22.32 28.81,22.32 28.19,22.94 | 34.59,22.81 X1.4 35.02,22.76 35.1,22.84 35.1,23.44 35.3,23.64 35.3,23.72 X1.2 | C11.1 C12.2 28.41,19.99 27.75,19.99 27.25,20.49 C10.1 | IC2.C3 IC2.C2 IC2.C1 IC2.B1 42.75,26.12 TP_GND.TP 38.74,25.72 38.4,25.38 36.96,25.38 X1.2 | U1.6 30.7,31.84 U1.9 | 29.78,32.84 30.07,32.55 30.07,32.47 U1.9 | 29.78,32.84 U1.1 | U1.9 30.07,31.71 30.07,31.63 29.9,31.46 29.58,31.46 U1.4 28.19,30.07 28.19,22.94 | U1.9 30.83,32.47 30.83,33.05 31.13,33.35 32.6,33.35 32.7,33.25 C32.2 34.46,33.78 36.9,33.78 37.56,33.12 37.56,31.82 36.83,31.09 35.81,31.09 IC4.B3 | 29.78,32.84 29.3,33.33 J3.SH1 J3.SH3 26.11,28.6 J3.A1_B12 | R8.1 12.38,24.09 J2.MP1 J2.MP2 7.99,3.88 C36.2 | U$42.1 13.52,15.75 U$43.1 | C7.2 14.77,32.69 14.77,31.38 14.55,31.15 14.38,31.15 C8.1 | R15.1 23.77,26.93 23.77,25.92 | 23.77,25.92 23.57,25.72 20.41,25.72 U$39.2 | 23.77,25.92 23.97,25.72 26.77,25.72 27.37,26.32 27.37,27.82 26.67,28.52 26.87,28.72 26.97,28.72 | C10.1 26.81,22.25 25.25,22.25 25.12,22.11 25.12,21.67 R1.1 24.48,21.03 IC1.D2 | C10.1 27.4,22.83 27.4,23 27.53,23.13 28,23.13 28.19,22.94 | v34.98,6.13 34.49,6.62 33.31,6.62 31.59,8.34 D1.2 | C14.2 32.35,23.25 32.24,23.37 32.24,24.12 32.89,24.77 33.06,24.77 C16.2 33.5,24.91 34.52,25.93 34.99,25.93 35.12,25.8 35.12,25.63 C20.2 35.26,24.82 35.3,24.78 35.3,24.71 X1.2 | U2.P$75 32.56,19.31 U2.P$B7 32.56,20.24 32.48,20.32 32.48,20.6 32.88,20.99 32.88,21.83 C14.2 | IC3.8 IC3.9 24.8,15.61 24.8,15.46 25.72,14.54 26.52,14.54 26.71,14.35
  Top 0.152: 26.71,14.35 19.99,7.63 D2.1 | C23.2 C21.2 | C22.2 39.03,17.51 C24.2 | C27.2 27.54,14.35 27.5,14.31 26.99,14.31 26.96,14.35 26.71,14.35
  Top 0.305: 15.52,33.58 C7.2 | C7.2 16.64,33.51 C1.2 17.82,33.56 J3.SH2 | 12.06,33.56 C3.2 | C3.2 13.11,33.59 C4.1 13.2,33.6 C2.2 14.28,33.51 C7.2 | 17.78,33.6 J3.SH2 | J3.SH2 J3.SH1 | C28.2 8.55,31.1 C29.2 9.14,31.15 C26.2 10.64,31.15 C17.2 C9.2 11.51,31.12 C37.2 | C3.2 12.08,33.58 C5.2 C6.2 8.93,33.57 C13.2 7.96,33.54 TP_BAT_GND.TP 6.35,32.87 5.7,33.52 5.47,33.52 5.03,33.41 4.12,32.98 3.98,32.88 2.35,31.25 2.35,29.83 1.45,28.93 1.45,26.14 1.94,25.64 10.83,25.64 12.38,24.09 | U$39.2 19.94,27.06 U$38.2 19.96,27.04 R14.2 | U$40.1 13.36,20.52 U$41.1 14.3,19.85 SJ1.1 14.63,19.16 C30.2 | U$43.1 U$44.1 U$45.1 U$46.1 U$47.1 U$48.1 U$49.1 | SW1.1 15.57,4.29 C35.2 16.62,3.48 C33.2 18.27,3.97 v18.27,4.31 | SW2.1 25.03,3.76 25.63,3.76 25.81,3.58 25.81,3.47 v26.36,2.91 | C21.2 C18.2 38.91,19.56 C15.2 | C25.2 38.95,16.77 C24.2 | v28.97,2.32 28.79,2.14 C34.2 | v21.87,7.82 21.18,7.13 D2.1 | v34.98,6.13 35.32,5.79 SW3.1
  Bottom 0.152: U2.P$87 U2.P$88 U2.P$89 U2.P$90 U2.P$86 U2.P$85 U2.P$84 U2.P$83 U2.P$79 U2.P$80 U2.P$81 U2.P$82 U2.P$78 U2.P$77 U2.P$76 U2.P$75
  Bottom 0.305: v21.87,7.82 21.57,7.82 18.27,4.52 | 18.27,4.52 18.07,4.32 18.07,3.52 18.57,3.02 19.37,3.02 21.07,4.72 24.66,4.72 25.81,3.58 25.81,3.47 v26.36,2.91 28.38,2.91 v28.97,2.32 28.97,3.08 32.09,6.2 32.66,6.2 32.73,6.13 v34.98,6.13 | v18.27,4.31 18.27,4.52
HAPTIC_EN  (via drill 0.35)
  Top 0.152: U2.P$U1 30.69,15.84 29.95,15.84 29.75,15.64 v29.37,15.64 | IC4.A1 33.63,32.52 v33.22,32.11
  Bottom 0.152: v33.22,32.11 35.83,32.11 38.12,29.82 39.87,29.82 41.97,27.72 41.97,26.82 34.87,19.72 28.67,19.72 28.67,16.34 v29.37,15.64
IMU_INT1  (1 unrouted)
IMU_INT2  (1 unrouted)
LX1
  Top 0.152: L1.1 35.73,26.06 37.4,26.06 IC2.B3 IC2.B2
LX2
  Top 0.152: L1.2 35.22,29.09 37.32,26.98 37.4,26.98 IC2.D3 IC2.D2
MOSI  (1 unrouted)
N$1
  Top 0.152: ANT1.1 39.83,20.21 C23.1 39.69,20.21 39.69,20.04 C22.1 39.05,18.02 L4.2
N$2
  Top 0.152: IC1.D1 23.96,20.53 R1.2
N$3
  Top 0.152: C20.1 34.64,25.38 X1.3 34.64,23.99 33.99,23.33 33.99,22.19 34.29,21.9 35.87,21.9 36.81,20.96 U2.P$A23
N$4
  Top 0.152: IC2.D1 38.95,26.92 R4.1
N$5
  Top 0.152: C12.1 29.58,19.46 U2.P$C1
N$6
  Top 0.152: R5.1 38.89,27.32 IC2.E1
N$7  (1 unrouted)
  Top 0.152: C10.2 28.35,22.1 X2.1
N$8
  Top 0.152: X2.2 25.9,21.12 28.77,18.25 29.24,18.25 29.37,18.38 29.37,18.55 C11.2 29.61,18.79 30.95,18.79 31.02,18.71 U2.P$F2
N$9
  Top 0.152: D3.1 19.87,10.63 D2.2 19.99,10.65 C31.1
N$10
  Top 0.152: R6.1 25.91,17.27 IC3.1
N$11
  Top 0.152: L2.2 30.71,21.76 L3.1
N$12  (1 unrouted)
  Top 0.152: U2.P$E24 37.38,18.89 C15.1 | L3.2 31.47,21.22 C19.1 31.6,21.36 C14.1 32.06,21.07 U2.P$B5
N$13
  Top 0.152: Q2.3 15.78,21.62 16.48,21.62 16.96,21.13 16.96,18.62 16.38,18.04 D4.2 | U$30.2 15.22,17.09 D4.2 | D4.2 18.6,13.71 C31.2
N$14
  Top 0.152: C21.1 37.69,20.34 U2.P$B24 37.31,21.25 X1.1
N$15
  Top 0.152: L2.1 31.3,19.96 U2.P$B3
N$16
  Top 0.152: U2.P$D23 36.81,19.69 36.87,19.63 37.45,19.63 37.45,19.64 C18.1
N$19
  Top 0.152: U2.P$H23 36.81,18.22 37.11,18.22 37.17,18.29 37.45,18.29 37.59,18.14 L4.1 38.42,17.46 C24.1
N$21
  Top 0.152: IC4.A2 34.43,32.57 34.43,32.75 C32.1
N$23
  Top 0.152: U2.P$AC5 31.95,14.35 C27.1
N$24
  Top 0.152: C25.1 37.53,16.74 U2.P$N24
N$25
  Top 0.152: J2.4 11.31,21.8 U$40.2
N$26
  Top 0.152: U$41.2 11.22,20.98 11.22,21.04 10.96,21.3 J2.5
N$27
  Top 0.152: U2.P$A18 35.31,20.66 34.51,21.46 34.2,21.46 33.69,21.97 33.69,23.92 C16.1
N$29
  Top 0.152: J3.A5 23.66,28.56 R15.2
N$35
  Top 0.152: R9.1 15.55,20.87 R10.2 15.78,21.11 15.78,21.18 15.91,21.31 16.35,21.31 16.49,21.18 16.49,21.1 16.57,21.02 16.57,19.94 SJ1.2
N$40
  Top 0.152: J2.18 10.76,14.92 11.09,14.92 11.66,15.5 U$43.2
N$41
  Top 0.152: J2.19 10.76,14.42 11.09,14.42 11.27,14.6 U$44.2
N$42
  Top 0.152: J2.20 12.4,13.8 U$45.2
N$44
  Top 0.152: J2.22 11.58,12.8 U$47.2
N$46
  Top 0.152: J2.24 10.76,11.8 U$49.2
N$52
  Top 0.152: J3.B5 R14.1
OUT+
  Top 0.152: TP_OP.TP IC4.A3
OUT-
  Top 0.152: IC4.C3 34.95,31.52 35.68,30.79 37.43,30.79 TP_ON.TP
P0.13
  Top 0.152: R11.1 8.8,4.19 C36.1 8.9,4.29 SW1.2 10.67,4.61 11.58,5.53 24.61,5.53 26.97,3.17 26.97,1.89 27.59,1.26 29.41,1.26 31.05,2.9 31.05,6.74 29.97,7.82 29.97,10.82 32.67,10.82 33.07,11.22 33.07,13.63 32.81,13.89 U2.P$AD8
P1.01  (via drill 0.35)
  Top 0.152: R7.1 29.48,5 Q1.1 27.87,5.65 v27.87,6.12 | v38.07,13.82 37.76,14.13 37.17,14.13 36.81,14.49 U2.P$Y23
  Bottom 0.152: v27.87,6.12 31.47,6.12 34.57,9.22 34.57,9.92 38.07,13.42 v38.07,13.82
P1.02  (via drill 0.35)
  Top 0.152: C34.1 R13.1 29.84,3.14 v29.97,3.02 | SW3.2 32.52,5.37 v32.37,5.52 | v38.97,15.62 38.81,15.46 U2.P$W24
  Bottom 0.152: v29.97,3.02 32.37,5.42 v32.37,5.52 | v32.37,5.52 35.49,5.52 35.59,5.62 35.59,10.44 38.97,13.82 v38.97,15.62 | v32.37,5.52
P1.14  (via drill 0.35)  (1 unrouted)
  Top 0.152: R12.1 16.61,2.25 C35.1 17.01,2.36 17.52,1.85 18.81,1.85 20.64,3.68 21.13,3.68 SW2.2 21.07,4.92 v17.27,4.92 | v22,8.79 22.57,8.22 v29.28,8.22
  Bottom 0.152: v17.27,4.92 18.07,4.92 21.94,8.79 v22,8.79 | v32.84,23.62 31.71,23.62 28.36,20.27 28.36,15.52 28.46,15.42 28.46,9.03 v29.28,8.22
PMIC_INT  (1 unrouted)
PREVGH
  Top 0.152: U$46.2 11.99,13.3 J2.21 10.52,13.18 10.2,13.18 9.76,12.74 9.76,11.43 11.46,9.72 11.46,9.22 11.87,8.82 15.86,8.82 17.02,9.98 17.02,11.32 16.38,11.96 D4.1
PREVGL
  Top 0.152: U$48.2 11.17,12.3 J2.23 10.52,12.18 10.2,12.18 10.06,12.04 10.06,11.55 11.77,9.85 11.77,9.42 11.97,9.22 14.96,9.22 D3.2
RESE
  Top 0.152: J2.3 12.35,22.3 Q2.2 13.59,21.86 R9.2
RESET  (2 unrouted)
SCK  (1 unrouted)
SCL  (via drill 0.35)  (1 unrouted)
  Top 0.152: 39.97,27.22 39.77,27.03 39.71,27.03 R4.2 | 33.88,30.22 IC4.C1 33.49,31.52 33.48,31.51 32.59,31.51 31.75,32.34 U1.7 | TP_SCL.TP 42.45,29.7 39.97,27.22 | IC3.12 26.07,16.75 26.69,16.12 | 26.69,16.12 26.87,16.12 27.4,16.12 27.96,16.68 27.96,16.75 R2.2 | 39.97,27.22 39.97,27.86 39.98,27.87 39.98,29.11 39.07,30.02 34.08,30.02 33.88,30.22 | v32.97,29.22 33.43,29.68 33.43,29.78 33.87,30.22 33.88,30.22 | v23.67,24.62 23.47,24.42 v20.07,24.42 | IC1.B1 23.07,20.22 v22.67,19.82 | v25.97,16.02 26.08,16.12 26.69,16.12
  Bottom 0.152: v32.97,29.22 28.27,29.22 v23.67,24.62 | v20.07,24.42 20.07,22.42 v22.67,19.82 25.97,16.52 v25.97,16.02
SDA  (via drill 0.35)  (1 unrouted)
  Top 0.152: U2.P$L1 28.2,17.46 R3.2 27.96,17.71 27.96,17.78 27.81,17.93 25.18,17.93 24.8,17.54 24.8,17.4 IC3.2 24.68,18.71 v23.57,19.82 | U1.8 32.25,32.84 v32.37,32.72 | IC1.C1 23.54,20.56 23.54,20.49 23.57,20.46 v23.57,19.82 | v39.67,30.82 40.52,31.67 TP_SDA.TP | v39.27,28.32 39.55,28.03 R5.2 | v32.27,30.92 v32.27,28.32 | v23.57,19.82 v23.58,19.82 | v23.57,23.71 v23.56,23.72 v20.77,23.72
  Bottom 0.152: v39.67,30.82 37.77,32.72 v32.37,32.72 32.37,31.03 v32.27,30.92 | v39.27,28.32 v32.27,28.32 28.23,28.32 23.92,24.01 23.87,24.01 v23.57,23.71 | v20.77,23.72 20.77,22.63 v23.58,19.82
SWDCLK  (1 unrouted)
  Top 0.152: U2.P$AA24 40.89,14.96 TP_SWDCLK.TP
SWDIO  (1 unrouted)
  Top 0.152: U2.P$AC24 39.28,14.46 TP_SWDIO.TP
SWO
  Top 0.152: U2.P$AD22 36.31,12.59 36.73,12.17 TP_SWO.TP
VBAT
  Top 0.152: 23.47,21.62 IC1.C2
  Top 0.305: C3.1 12.24,32.44 C37.1 12.29,31.58 12.57,31.58 12.76,31.39 12.76,30.86 11.99,30.08 4.25,30.08 TP_VBAT.TP 4,30.27 2.45,28.72 2.45,27.64 3.21,26.88 4.33,26.88 5.37,27.92 16.17,27.92 18.77,25.32 | 18.77,25.32 26.97,25.32 27.77,26.12 27.77,31.22 28.39,31.84 U1.3 U1.2 | 23.47,21.62 23.47,21.82 22.67,22.62 20.9,22.62 19.39,24.14 19.39,24.7 18.77,25.32
VBUS  (3 unrouted)
  Top 0.305: C7.1 16.64,32.51 C1.1 16.69,28.7 17.95,27.44 | 17.95,27.44 18.3,27.09 | 18.3,27.09 U$38.1 | 18.3,27.09 18.94,26.45 U$39.1 | 17.95,27.44 18.85,27.44 19.13,27.72 19.67,27.72 19.97,28.02 J3.A9_B4 19.97,29.22 20.57,29.82 24.17,29.82 24.77,29.22 J3.A4_B9
VREG  (2 unrouted)
  Top 0.152: IC2.A3 IC2.A2 IC2.A1
  Top 0.305: C8.2 14.19,31.59 C2.1 13.2,32.6 C4.2 13.15,31.65 13.22,31.58 13.22,30.57 11.29,28.64 4.21,28.64 TP_VREG.TP